# EAGLE board SHTC3 Breakout (EAGLE 9.1.3)
REVISION: A
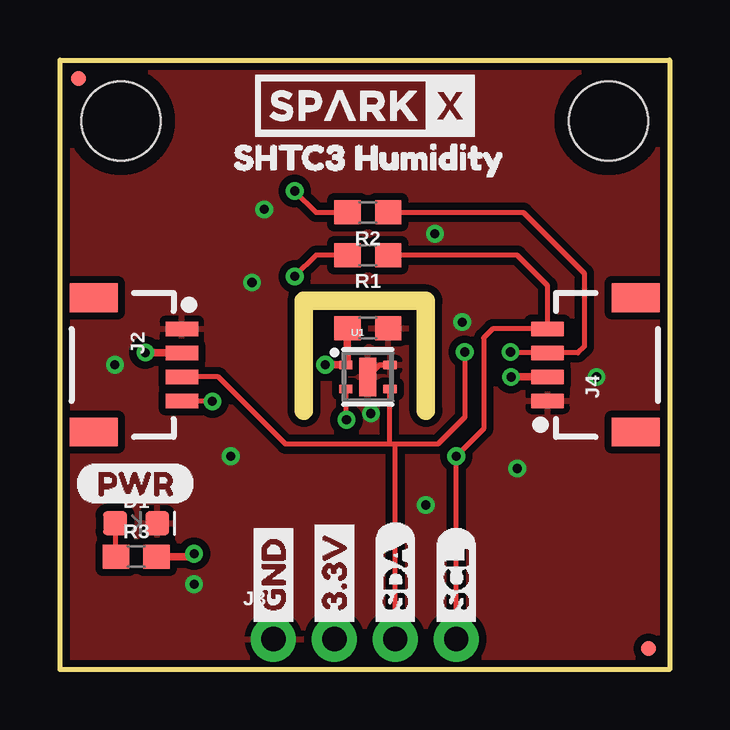
[diagram p0: board, top side]
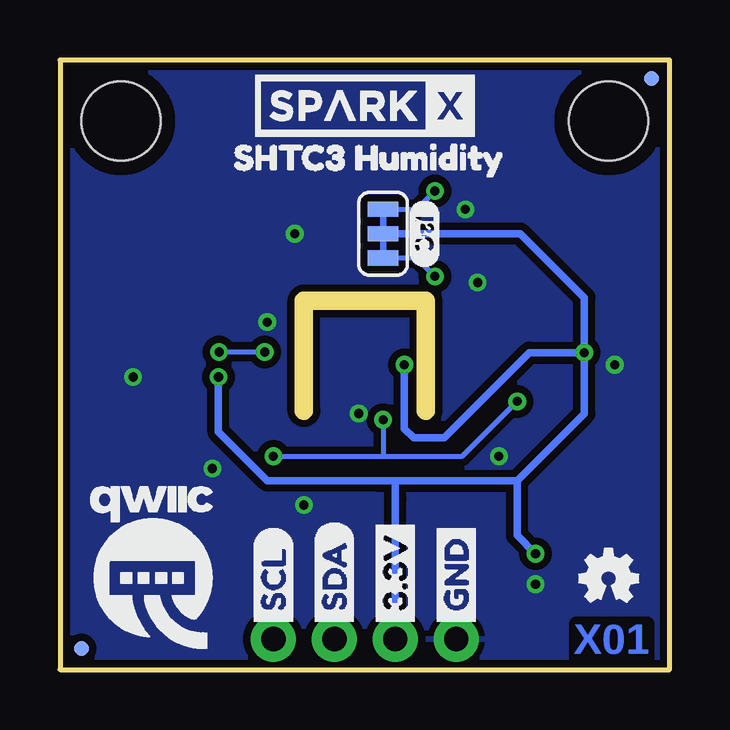
[diagram p1: board, bottom side, seen from below]

Size 25.4 x 25.4 mm. Coordinates in mm from the lower left corner, seen from the top.
Outline: 0,0 0,25.4 25.4,25.4 25.4,0 0,0
Copper layers (1*16): Top 0.035mm / dielectric 1.5mm / Bottom 0.035mm
Design rules "SparkFun-2-layer-TIGHT": minimum track width 7mil, minimum drill 15mil, track to track 7mil, track to pad 7mil, pad to pad 7mil, via to via 7mil, smd to smd 7mil, copper to edge 7mil, drill to drill 7mil, minimum pad ring 7mil, minimum via ring 7mil, stop-mask expansion 4mil, vias tented up to drill 25mil, thermal gap 10mil
Net classes: 1 power: width 0.203 mm
tRestrict: 3 lines
bRestrict: 3 lines
Milling: 3 lines

## Footprints (pad centres in the part's own frame; a part is rotated, then mirrored left to right if it is on the bottom)
0603 = smd 1.1 x 1: 1 -0.85,0; 2 0.85,0
LED-0603 = smd 1 x 1: A -0.877,0; C 0.877,0
1X04_1MM_RA = smd 0.6 x 1.35: 1 -1.5,0; 2 -0.5,0; 3 0.5,0; 4 1.5,0 | smd 1.2 x 2: NC1 2.8,-3.675; NC2 -2.8,-3.675
1X04_NO_SILK = drill 1.016 pad 1.88: 1 0,0; 2 2.54,0; 3 5.08,0; 4 7.62,0
MICRO-FIDUCIAL = smd 0.635 x 0.635: 1 0,0
STAND-OFF = hole 3.302: 0,0
SMT-JUMPER_3_2-NC_TRACE_SILK = smd 0.635 x 1.27: 1 -1.016,0; 2 0,0; 3 1.016,0
SHTC3 = smd 0.55 x 0.35: 1 -0.925,0.5; 2 -0.925,-0.5; 3 0.925,-0.5; 4 0.925,0.5 | smd 0.7 x 1.6: 5 0,0

## Placement (x,y rotation side)
C1  0.1uF  [0603]  12.83,14.22 0 top
D1  RED  [LED-0603]  3.17,6.1 0 top
FRAME1  FRAME-LETTER  [CREATIVE_COMMONS]  -12.7,-19.05 0 top  (outside the outline)
J2  [1X04_1MM_RA]  5.08,12.7 270 top
J3  PTH  [1X04_NO_SILK]  8.89,1.27 0 top
J4  [1X04_1MM_RA]  20.32,12.7 90 top
JP1  FIDUCIALUFIDUCIAL  [MICRO-FIDUCIAL]  0.76,24.64 0 bottom
JP2  FIDUCIALUFIDUCIAL  [MICRO-FIDUCIAL]  24.51,0.89 0 top
JP3  STAND-OFF  [STAND-OFF]  2.54,22.86 0 top
JP4  STAND-OFF  [STAND-OFF]  22.86,22.86 0 top
JP5  FIDUCIALUFIDUCIAL  [MICRO-FIDUCIAL]  24.51,0.89 0 bottom
JP6  FIDUCIALUFIDUCIAL  [MICRO-FIDUCIAL]  0.76,24.64 0 top
JP7  JUMPER-SMT_3_2-NC_TRACE_SILK  [SMT-JUMPER_3_2-NC_TRACE_SILK]  11.94,18.16 270 bottom
LOGO1  OSHW-LOGOMINI  [OSHW-LOGO-MINI]  2.54,3.81 0 bottom
R1  2.2k  [0603]  12.83,17.27 180 top
R2  2.2k  [0603]  12.83,19.05 180 top
R3  1k  [0603]  3.17,4.7 0 top
U1  SHTC3  [SHTC3]  12.83,12.19 0 top
U$1  SPARKX-LOGO4  [SPARKX-MEDIUM]  12.7,23.5 0 top
U$2  SPARKX-LOGO4  [SPARKX-MEDIUM]  12.7,23.5 0 bottom
U$3  [GND1]  8.89,1.52 90 bottom
U$4  [3#3V2]  11.43,1.52 90 bottom
U$5  [SDA8]  13.97,1.52 90 bottom
U$6  [SCL9]  16.51,1.52 90 bottom
U$7  [SHTC3_HUMIDITY1]  19.05,21.34 0 bottom
U$8  [SHTC3_HUMIDITY1]  6.35,21.34 0 top
U$9  [I_SUPER2_C-()-03]  10.21,19.58 270 bottom
U$10  [(PWR)]  0.64,7.75 0 top
U$21  [3#3V2]  11.43,1.52 90 top
U$22  [GND1]  8.89,1.52 90 top
U$26  [SCL9]  16.51,1.52 90 top
U$27  [SDA8]  13.97,1.52 90 top
U$29  [QWIIC-LOGO-MEDIUM]  21.59,4.32 0 bottom

## Library data of the parts
C1 = SparkFun-Capacitors; PROD_ID: CAP-00810
D1 = SparkFun-LED; PROD_ID: DIO-00819
FRAME1 LOGO1 = SparkFun-Aesthetics
J2 J4 = SparkFun-Connectors; PROD_ID: CONN-13694
J3 U$1 U$2 = SparkX
JP1-JP6 = SparkFun
JP7 = SparkFun-Jumpers
R1 R2 = SparkFun-Resistors; PROD_ID: RES-08272
R3 = SparkFun-Resistors; PROD_ID: RES-07856
U1 = SHTC3
U$3-U$6 U$10 U$21 U$22 U$26 U$27 = Labels-0_04
U$7 U$8 = buzzard_labels
U$9 U$29 = Labels

## Nets
3.3V: C1.1 J2.2 J3.2 J4.2 JP7.2 R3.2 U1.1
GND: C1.2 D1.C J2.1 J3.1 J4.1 U1.4 U1.5
N$1: JP7.3 R1.2
N$2: JP7.1 R2.2
N$3: D1.A R3.1
SCL: J2.4 J3.4 J4.4 R1.1 U1.2
SDA: J2.3 J3.3 J4.3 R2.1 U1.3

## Tracks (layer width: path | path; a pad name or v marks a point on that pad's centre or on a via)
3.3V  (via drill 0.38)
  Top 0.305: v18.8,12.19 J4.2 | v3.56,13.21 J2.2 | v11.05,12.7 v11.06,12.69 U1.1 11.98,12.77 C1.1 | R3.2 5.46,4.7 v5.59,4.83
  Bottom 0.305: J3.2 11.43,7.11 11.43,7.87 | v18.8,12.19 18.8,9.91 16.76,7.87 12.19,7.87 11.43,7.87 | 6.35,7.87 3.56,10.67 v3.56,13.21 | v11.05,12.7 11.05,10.03 10.67,9.65 9.4,9.65 5.84,13.21 v3.56,13.21 | v5.59,4.83 6.35,5.59 6.35,7.87 | 11.43,7.87 6.35,7.87 | v3.56,13.21 3.56,15.49 6.22,18.16 JP7.2
GND  (via drill 0.38)
  Top 0.203: U1.5 13.33,12.69 U1.4
  other vias: 15.24,6.86 19.05,8.38 15.62,18.16 2.29,12.7 16.76,14.48 8.51,19.18 7.11,8.89 22.35,12.19 5.59,3.56 8,16.13 12.95,10.67
  pour Bottom (isolate 0.305): 0,0 0,25.4 25.4,25.4 25.4,0
  pour Top (isolate 0.305): 0,0 0,25.4 25.4,25.4 25.4,0
N$1  (via drill 0.38)
  Top 0.203: R1.2 10.67,17.27 v9.78,16.38
  Bottom 0.203: v9.78,16.38 10.54,17.14 JP7.3
N$2  (via drill 0.38)
  Top 0.203: R2.2 10.67,19.05 v9.78,19.94
  Bottom 0.203: v9.78,19.94 10.54,19.18 JP7.1
N$3
  Top 0.203: R3.1 2.33,6.07
  Top 0.254: 2.33,6.07 D1.A
SCL  (via drill 0.38)
  Top 0.203: v6.35,11.18 5.1,11.18 | J3.4 v16.51,8.89 17.65,10.03 17.65,13.82 18.03,14.2 J4.4 20.32,16 19.05,17.27 R1.1 | U1.2 11.9,10.45 v11.94,10.41
  Top 0.254: 5.1,11.18 J2.4
  Bottom 0.203: v6.35,11.18 8.64,8.89 11.94,8.89 | v16.51,8.89 11.94,8.89 | v11.94,10.41 11.94,8.89
SDA  (via drill 0.38)
  Top 0.203: J2.3 6.6,12.19 9.4,9.4 13.72,9.4 | v16.87,13.23 16.87,10.52 15.75,9.4 13.97,9.4 | 13.97,9.4 13.72,9.4 | J3.3 13.97,9.4 | U1.3 13.72,11.66 13.72,9.4 | R2.1 19.3,19.05 21.84,16.51 21.84,13.46 21.58,13.2 J4.3 18.8,13.2 v18.77,13.23
  Top 0.254: J2.3
  Bottom 0.203: v18.77,13.23 v16.87,13.23

## Text on the board
Bottom: X01
Measures: Dimensions in inches
tDocu: Bryan Hoff